# Altium PCB PCB1.PcbDoc
Units mm, origin at the board's own origin, x right, y up, seen from the top; angles counter-clockwise.
Board outline 100 x 60 mm, 2 copper layers (Top Layer, Bottom Layer); 22 components, 8 nets, 56 pads, 0 vias.
Unrouted connection lines stored in the file: 16.
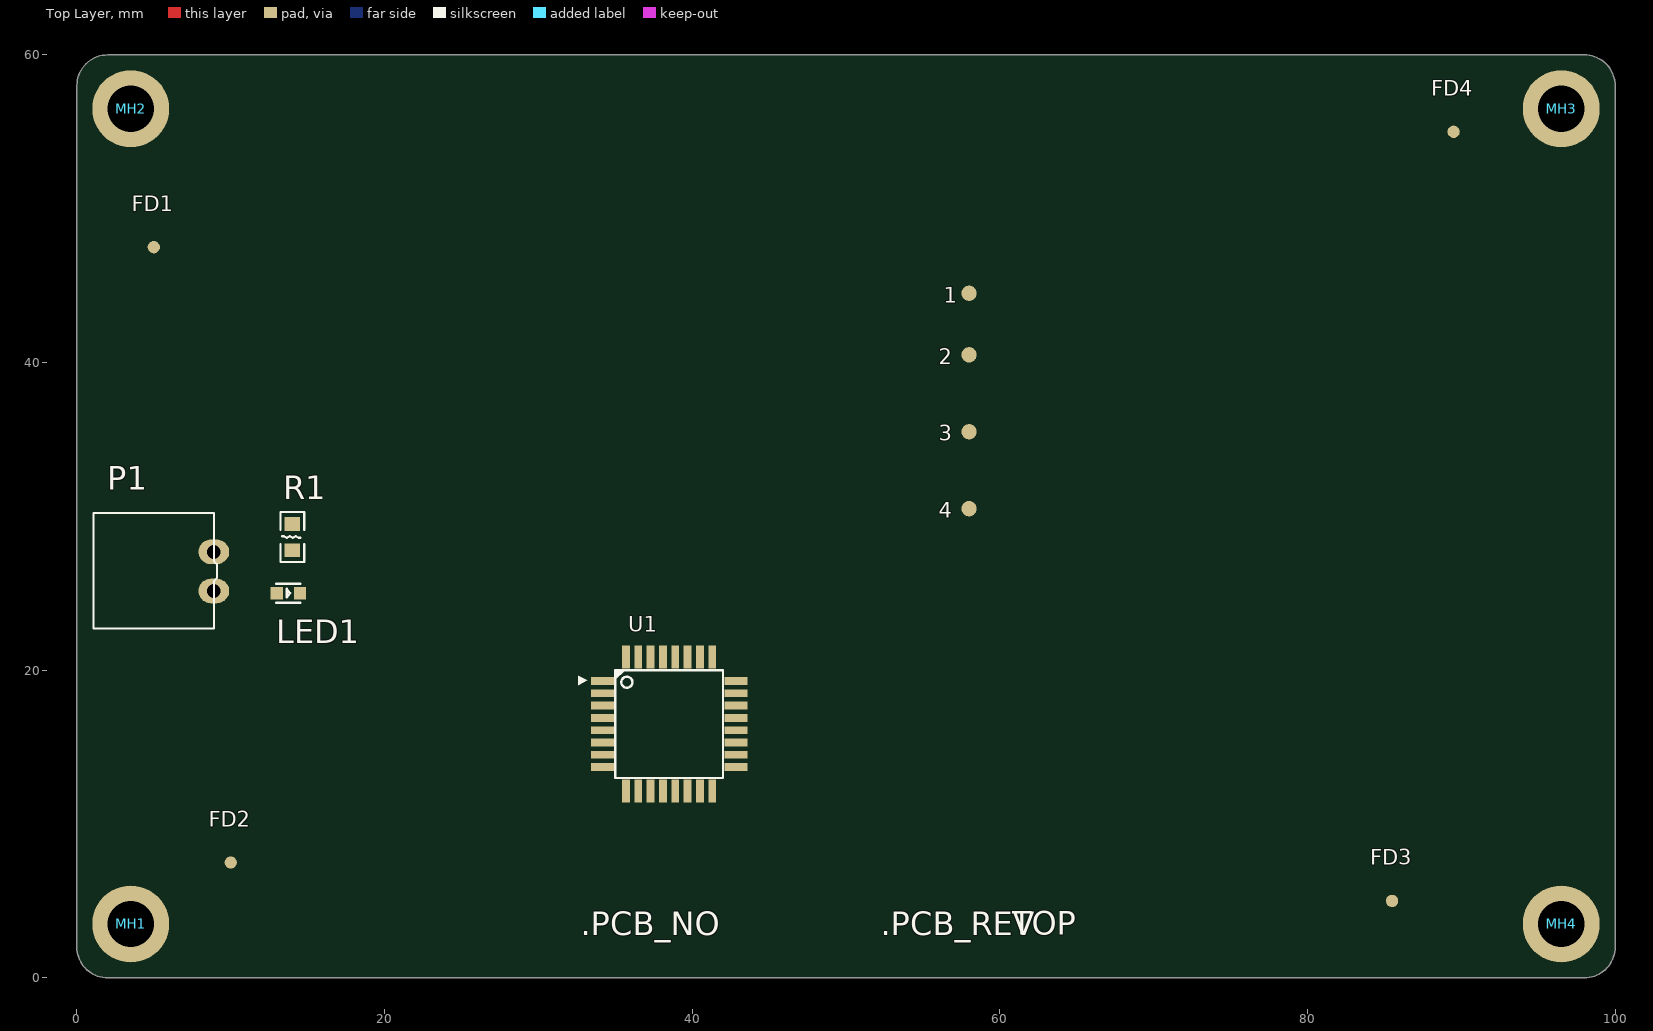
[diagram p0: Top Layer view]
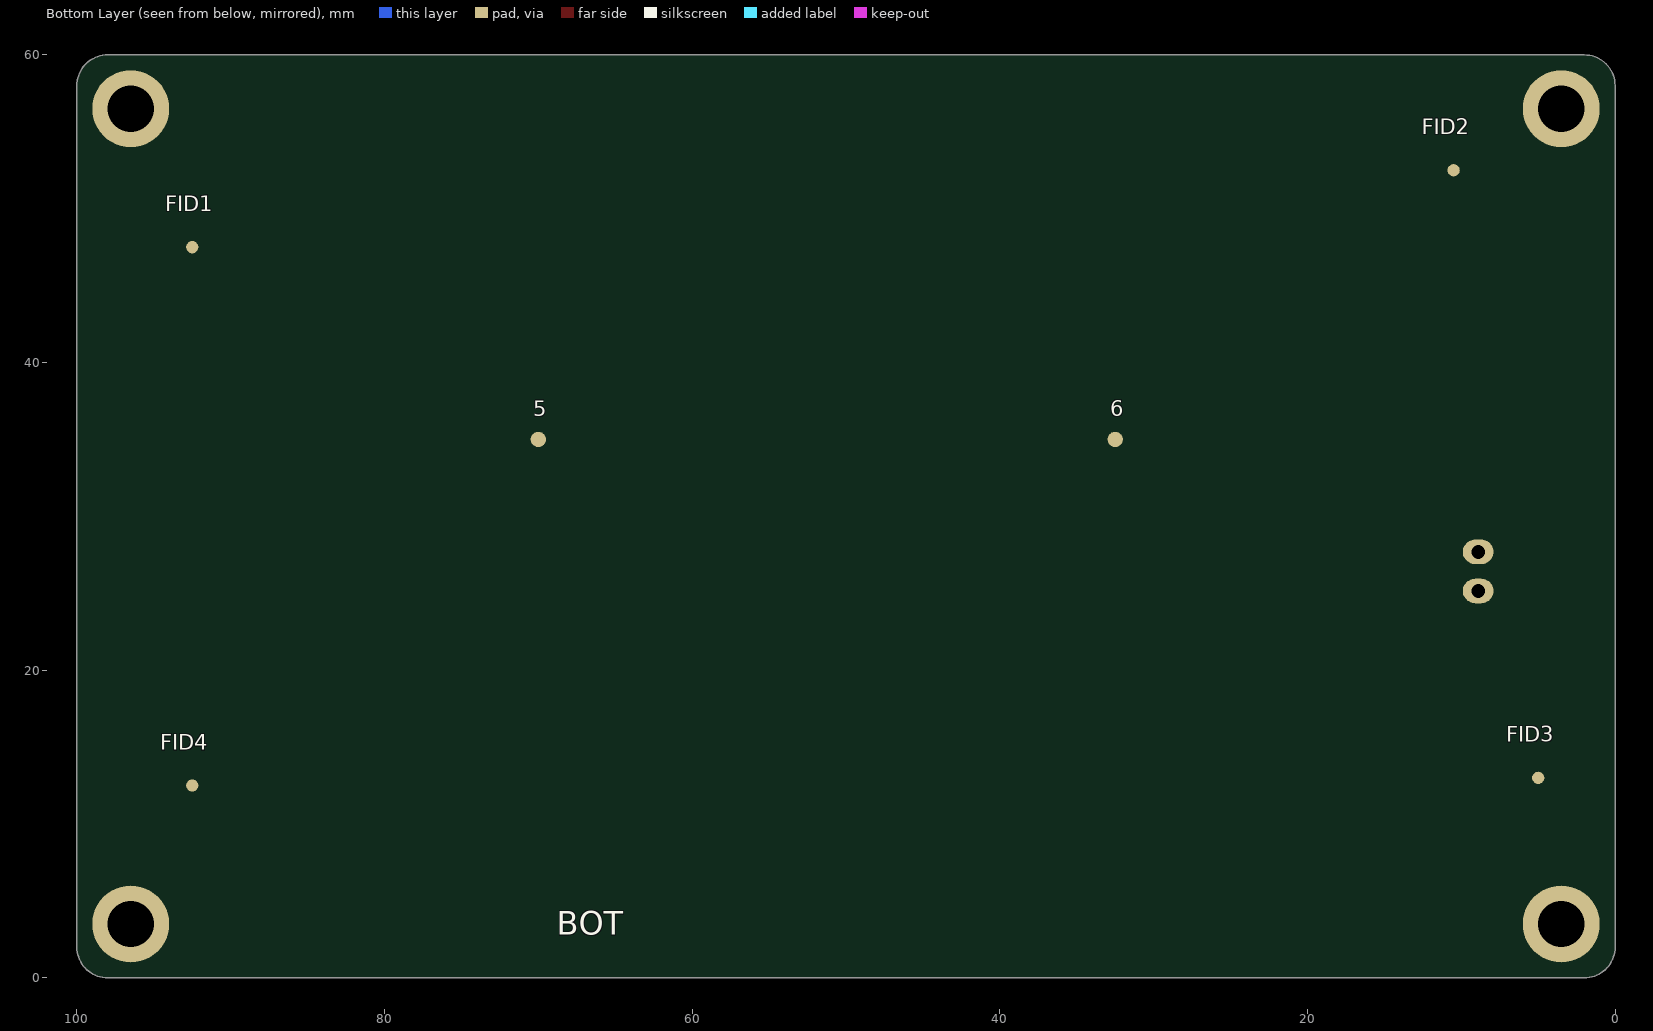
[diagram p1: Bottom Layer view, seen from below]

## Layer stack, top to bottom
Top Solder: solder mask 0.0102, Solder Resist, Dk 3.5
Top Layer: signal copper 0.0356
Dielectric 1: dielectric 0.32, FR-4, Dk 4.8
Bottom Layer: signal copper 0.0356
Bottom Solder: solder mask 0.0102, Solder Resist, Dk 3.5

## Board outline
0,2 0,58 cw(c2,58) 2,60 98,60 cw(c98,58) 100,58 100,2 cw(c98,2) 98,0 2,0 cw(c2,2)

## Design rules (kind name [scope] priority, off if disabled: settings)
AssemblyTestpoint [(IsPad And (OnTopLayer Or OnBottomLayer))] p1: testpointundercomponent=TRUE minsize=0.6 maxsize=2 preferedsize=1 minholesize=0 maxholesize=1 preferedholesize=0.813 testpointgrid=0.025 usegrid=TRUE gridtolerance=0 allowsidetop=TRUE allowsidebottom=TRUE
Clearance [All] p1: gap=0.254 ignorepadtopadclearanceinfootprint=FALSE
FabricationTestpoint [All] p1: side=3 testpointundercomponent=TRUE minsize=0.6 maxsize=2.54 preferedsize=1 minholesize=0 maxholesize=1.016 preferedholesize=0.813 testpointgrid=0.025 allowsidetop=TRUE allowsidebottom=TRUE usegrid=TRUE gridtolerance=0
PolygonConnect [All] p1: connectstyle=Relief reliefconductorwidth=0.254 reliefentries=4 polygonreliefangle="90 Angle" airgapwidth=0.254
RoutingVias [All] p1: holewidth=0.711 width=1.27 viastyle="Through Hole" minholewidth=0.711 minwidth=1.27 maxholewidth=0.711 maxwidth=1.27
SolderMaskExpansion [All] p1: expansion=0.102 istentingtop=FALSE
SupplyNets "Schematic Supply Nets_1" [InNet('VCC')] p1: voltage=0.000
SupplyNets "Schematic Supply Nets" [InNet('GND')] p2: voltage=0.000
Width [All] p1: maxlimit=0.254 minlimit=0.254 preferedwidth=0.254
28 further rules are at their usual default settings.

## Components (designator, comment, footprint, x,y, rotation, side; value= is the part's Value field where it differs from the comment)
1 "Test Point" TEST_POINT#1 58,44.5 r90 top
2 "Test Point" TEST_POINT#1 58,40.5 r90 top
3 "Test Point" TEST_POINT#1 58,35.5 r90 top
4 "Test Point" TEST_POINT#1 58,30.5 r90 top
5 "Test Point" TEST_POINT#2 70,35 r90 top
6 "Test Point" TEST_POINT#2 32.5,35 r90 top
FD1 "Global Fiducial Mark" FIDUCIAL_0.8MM 5,47.5 r0 top
FD2 "Global Fiducial Mark" FIDUCIAL_0.8MM 10,7.5 r0 top
FD3 "Global Fiducial Mark" FIDUCIAL_0.8MM 85.5,5 r0 top
FD4 "Global Fiducial Mark" FIDUCIAL_0.8MM 89.5,55 r0 top
FID1 "Global Fiducial Mark" FIDUCIAL_0.8MM 92.5,47.5 r90 bottom
FID2 "Global Fiducial Mark" FIDUCIAL_0.8MM 10.5,52.5 r90 bottom
FID3 "Global Fiducial Mark" FIDUCIAL_0.8MM 5,13 r90 bottom
FID4 "Global Fiducial Mark" FIDUCIAL_0.8MM 92.5,12.5 r90 bottom
LED1 "LEDCHIP" CHIP-LED0603 13.75,25 r270 top value=COLOR
MH1 "Mounting Hole" MOUNTING_HOLE_3MM 3.5,3.5 r0 top
MH2 "Mounting Hole" MOUNTING_HOLE_3MM 3.5,56.5 r0 top
MH3 "Mounting Hole" MOUNTING_HOLE_3MM 96.5,56.5 r0 top
MH4 "Mounting Hole" MOUNTING_HOLE_3MM 96.5,3.5 r0 top
P1 "Header 2" JST-PH-2PIN-2.54-THM 7,26.42 r90 top
R1 "RESISTOR" R0603 14,28.65 r270 top
U1 "ATMEGA328P-PU" TQFP32-08 38.5,16.5 r0 top

## Footprints (in the part's own frame and the unit in brackets; to place one, negate y for a bottom-side part, rotate by r counter-clockwise, add the part's x,y. Pads: shape width x height; smd on the part's side, far side on the other; paste and mask are expansions set on the pad)
CHIP-LED0603 [mil]
  rect 31.5x31.5 smd: A(0,-29.53) C(0,29.53)
  silkscreen extent -24,-31 24,30, body extent -17,-32 15,31, height 22
FIDUCIAL_0.8MM [mm]
  round 0.8 smd mask+0.5: 0(0,0)
JST-PH-2PIN-2.54-THM [mm]
  oval 1.6x2 hole 0.9: 1(-1.27,-1.9) 2(1.27,-1.9)
  silkscreen extent -3.7,-2.1 3.8,5.92, body extent -3.6,-2.12 3.61,5.92, height 5.84
MOUNTING_HOLE_3MM [mm]
  round 5 hole 3: 0(0,0)
R0603 [mm]
  rect 0.889x1 smd: 1(-0.85,0) 2(0.85,0)
  silkscreen extent -1.64,-0.76 1.61,0.77, body extent -1.07,-0.39 1.03,0.41, height 0.5
TEST_POINT#1 [mm]
  round 1 smd: 1(0,0)
TEST_POINT#2 [mm]
  round 1 smd far side: 1(0,0)
TQFP32-08 [mm]
  rect 1.5x0.508 smd: 1(-4.343,2.8) 2(-4.343,2) 3(-4.343,1.2) 4(-4.343,0.4) 5(-4.343,-0.4) 6(-4.343,-1.2) 7(-4.343,-2) 8(-4.343,-2.8) 17(4.343,-2.8) 18(4.343,-2) 19(4.343,-1.2) 20(4.343,-0.4) 21(4.343,0.4) 22(4.343,1.2) 23(4.343,2) 24(4.343,2.8)
  rect 0.508x1.5 smd: 9(-2.8,-4.343) 10(-2,-4.343) 11(-1.2,-4.343) 12(-0.4,-4.343) 13(0.4,-4.343) 14(1.2,-4.343) 15(2,-4.343) 16(2.8,-4.343) 25(2.8,4.343) 26(2,4.343) 27(1.2,4.343) 28(0.4,4.343) 29(-0.4,4.343) 30(-1.2,4.343) 31(-2,4.343) 32(-2.8,4.343)
  silkscreen extent -5.92,-3.5 3.5,3.56, body extent -4.5,-4.5 4.5,4.5, height 1.46

## Part data
1 2 3 4 5 6: library part TP
FD1 FD2 FD3 FD4: library part FD
FID1 FID2 FID3 FID4: library part FID
LED1: "SMD lamp beads"
MH1 MH2 MH3 MH4: library part MH
P1: library part JST-PH-2PIN-2.54-THM, "Header, 2-Pin", LatestRevisionDate=17-Jul-2002, LatestRevisionNote="Re-released for DXP Platform.", Publisher="Altium Limited"
R1: "Resistor ?K ±0.1% 0.1W"
U1: Package=TQFP32-08, DeviceSetName=ATMEGA168, GateName_1=G$1, LibraryName=SparkFun, SymbolName_1=ATMEGA168

## Nets (pads, with @x,y where several pads share a name; then routed paths per layer and width w, separated by ;. In a path a pad name is that pad's centre, name@x,y a point inside that pad or via, vN(x,y) a via of type N, cw(c..) or ccw(c..) an arc to the next point about the centre after c; other vN are vias at no path point)
AIN0: 5.1 U1.10
AIN1: 6.1 U1.11
GND: P1.2 R1.2 U1.3 U1.5 U1.21
NetLED1_C: LED1.C R1.1
RXD: 1.1 U1.30
SCK: 3.1 4.1 U1.17
TXD: 2.1 U1.31
VCC: LED1.A P1.1 U1.4 U1.6 U1.20 U1.29
pads on no net: FD1.0 FD2.0 FD3.0 FD4.0 FID1.0 FID2.0 FID3.0 FID4.0 MH1.0 MH2.0 MH3.0 MH4.0 U1.1 U1.2 U1.7 U1.8 U1.9 U1.12 U1.13 U1.14 U1.15 U1.16 U1.18 U1.19 U1.22 U1.23 U1.24 U1.25 U1.26 U1.27 U1.28 U1.32

## Silkscreen, mask and mechanical layers (free items; w line width, h text height)
Top Overlay:
  text "TOP" at 60.823,2.799 h1.52
  text ".PCB_NO" at 32.754,2.754 h1.52
  text ".PCB_REV" at 52.254,2.754 h1.52
Bottom Overlay:
  text "BOT" at 68.815,2.799 h1.52
Mechanical 1:
  the board outline again, w0.254